# Altium PCB PCB3.PcbDoc
Units mm, origin at the board's own origin, x right, y up, seen from the top; angles counter-clockwise.
Board outline 58.93 x 70.99 mm, 2 copper layers (Top Layer, Bottom Layer); 30 components, 38 nets, 155 pads, 2 vias.
Unrouted connection lines stored in the file: 53.
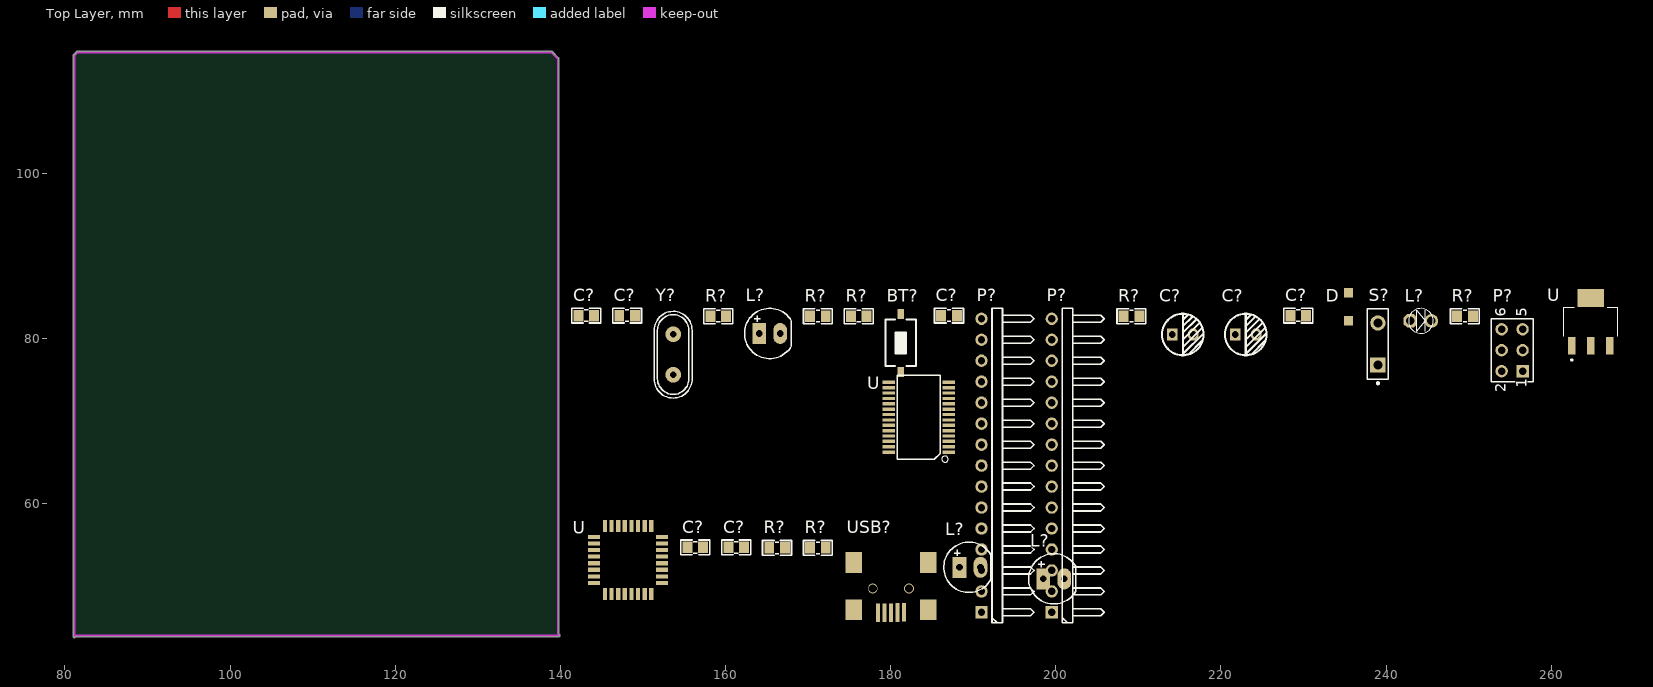
[diagram p0: Top Layer view]
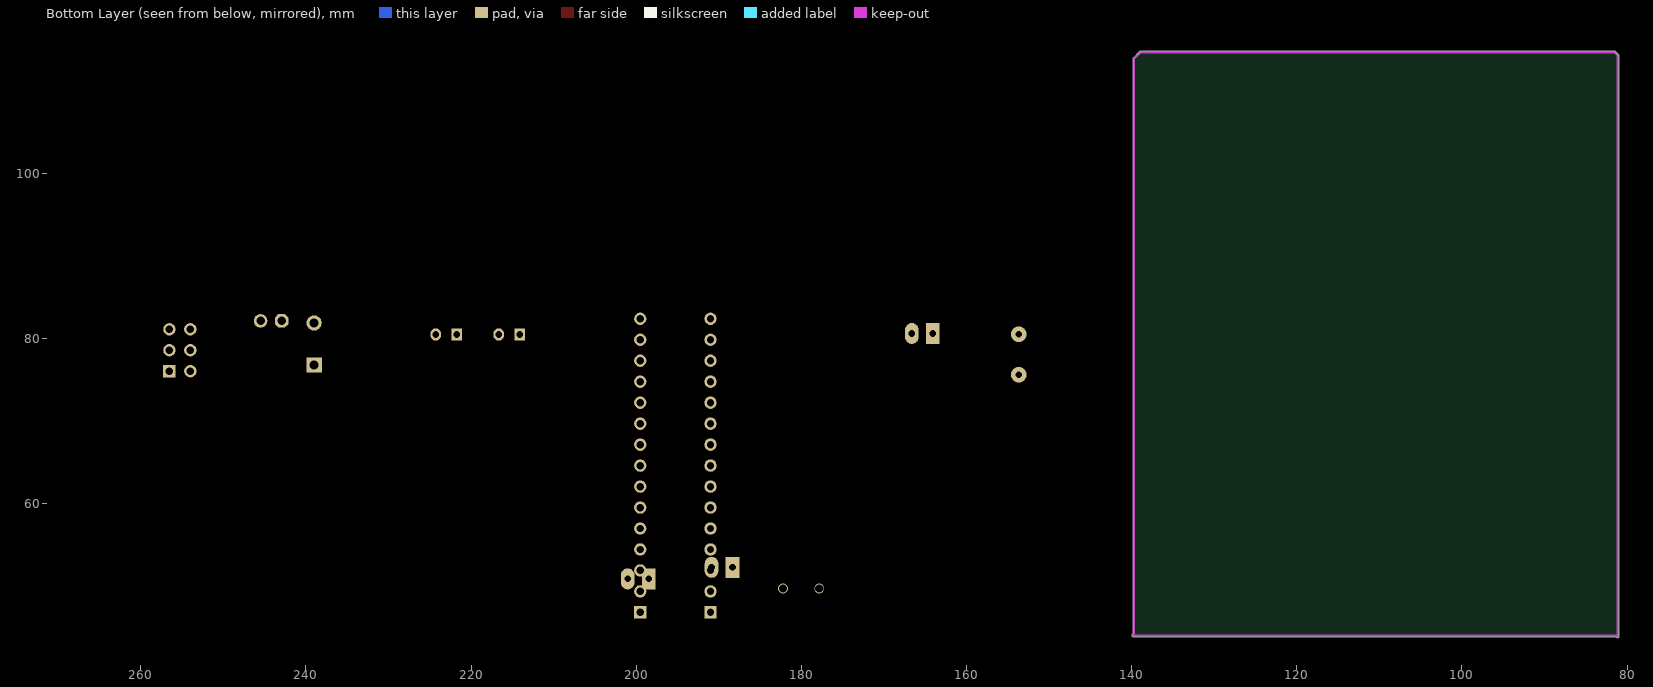
[diagram p1: Bottom Layer view, seen from below]

## Layer stack, top to bottom
Top Solder: solder mask 0.0102, Solder Resist, Dk 3.5
Top Layer: signal copper 0.0356
Dielectric 1: dielectric 0.32, FR-4, Dk 4.8
Bottom Layer: signal copper 0.0356
Bottom Solder: solder mask 0.0102, Solder Resist, Dk 3.5

## Board outline
81.026,43.942 ccw(c81.153,43.942) 81.244,43.852 81.333,43.942 139.827,43.942 ccw(c139.827,44.069) 139.954,44.069 ccw(c139.827,44.069) 139.917,44.16 139.827,44.249 139.827,113.919 ccw(c139.7,113.919) 139.79,114.01 139.028,114.771 ccw(c138.938,114.682) 138.938,114.808 81.534,114.808 ccw(c81.534,114.681) 81.443,114.771 81.063,114.39 ccw(c81.152,114.3) 81.026,114.3

## Design rules (kind name [scope] priority, off if disabled: settings)
Clearance [All] p1: gap=0.254 ignorepadtopadclearanceinfootprint=FALSE except(0: Arc-Hole Track-Hole SMDPad-Hole THPad-Hole Via-Hole Fill-Hole Poly-Hole Region-Hole Text-Hole)
PolygonConnect [All] p1: connectstyle=Relief reliefconductorwidth=0.254 reliefentries=4 polygonreliefangle="90 Angle" airgapwidth=0.254
RoomDefinition Sheet4 [InComponentClass('Sheet4')] p1: confinementstyle=ConfineIn formatcopy=TRUE lockcomponents=FALSE outline 154.686,61.087 184.531,61.087 184.531,72.009 154.686,72.009
RoutingVias [All] p1: holewidth=0.254 width=0.254 viastyle="Through Hole" minholewidth=0.457 minwidth=0.508 maxholewidth=0.711 maxwidth=1.27
SolderMaskExpansion [All] p1: expansion=0.102 istentingtop=FALSE
Width [All] p1: maxlimit=1.27 minlimit=0.254 preferedwidth=0.254
30 further rules are at their usual default settings.

## Classes and differential pairs
component class Sheet4: BT? C? D L? P? R? S? U USB? Y?

## Components (designator, comment, footprint, x,y, rotation, side; value= is the part's Value field where it differs from the comment)
BT? "Nut Nhan 2 Chan SMD 3x6x2.5" "Nut Nhan 2 Chan SMD 3x6x2.5" 181.229,79.502 r90 top
C? "15pF" "tu 0805" 148.082,82.804 r0 top
C? "104" "tu 0805" 187.071,82.804 r0 top
C? "4.7uF" "tu hoa 5mm" 223.012,80.518 r0 top
C? "104" "tu 0805" 229.362,82.804 r0 top
C? "15pF" "tu 0805" 143.129,82.804 r0 top
C? "4.7uF" "tu hoa 5mm" 215.392,80.518 r0 top
C? "104" "tu 0805" 161.29,54.737 r0 top
C? "104" "tu 0805" 156.337,54.737 r0 top
D "MBR0520" SOD-123 235.458,82.169 r90 top
L? "LED 5mm" LED-5MM-RED 164.084,80.645 r0 top
L? "LED 3mm" LED-3MM-GREEN 242.951,82.169 r0 top
L? "LED 5mm" LED-5MM-RED 198.501,50.927 r0 top
L? "LED 5mm" LED-5MM-BLUE 189.484,52.324 r0 top
P? "Header 15H" HDR1X15H 199.517,46.863 r90 top
P? "Header 3X2" HDR2X3 256.54,76.073 r90 top
P? "Header 15H" HDR1X15H 191.008,46.863 r90 top
R? "680R" "Tro SMD 0805" 159.131,82.804 r0 top
R? "1k" "tro smd 0805" 176.149,82.804 r0 top
R? "1k" "tro smd 0805" 209.169,82.804 r0 top
R? "1k" "tro smd 0805" 171.196,82.804 r0 top
R? "680R" "Tro SMD 0805" 249.555,82.804 r0 top
R? "680R" "tro smd 0805" 171.196,54.737 r0 top
R? "680R" "tro smd 0805" 166.243,54.737 r0 top
S? "SW-SPST" SPST-2 239.014,79.375 r90 top
U "UA78M05IDCY" SOT230P700X180-4N 264.795,82.042 r90 top
U "INTERFACE-FT232RL(SSOP28)" SSOP28-0.65-10.2X5.2MM 183.415,70.5 r90 top
U "ATMEGA168-20AU" QFP80P900X900X120-32N 148.209,53.213 r90 top
USB? "USB Mini 5p SMD" "USB Mini 5p SMD" 179.959,50.292 r0 top
Y? "16Mhz" "Thach Anh 2 chan cam" 153.67,78.105 r90 top value=4Mhz

## Footprints (in the part's own frame and the unit in brackets; to place one, negate y for a bottom-side part, rotate by r counter-clockwise, add the part's x,y. Pads: shape width x height; smd on the part's side, far side on the other; paste and mask are expansions set on the pad)
HDR1X15H [mm] "Connector; Header; 15 Position; Right Angle"
  rect 1.5x1.5 hole 0.9: 1(0,0)
  round 1.5 hole 0.9: 2(2.54,0) 3(5.08,0) 4(7.62,0) 5(10.16,0) 6(12.7,0) 7(15.24,0) 8(17.78,0) 9(20.32,0) 10(22.86,0) 11(25.4,0) 12(27.94,0) 13(30.48,0) 14(33.02,0) 15(35.56,0)
  silkscreen extent -1.27,-6.35 36.83,-1.27
HDR2X3 [mm] "Connector; Header; 3x2 Position"
  rect 1.5x1.5 hole 0.9: 1(0,0)
  round 1.5 hole 0.9: 2(0,2.54) 3(2.54,0) 4(2.54,2.54) 5(5.08,0) 6(5.08,2.54)
  silkscreen extent -1.27,-1.27 6.35,3.81
LED-3MM-GREEN [mil]
  oct 65x65 hole 40: 1(0,0)
  round 65 hole 40: 2(100,0)
  silkscreen extent -9,-59 109,59, body extent -15,-70 112,60, height 182
LED-5MM-BLUE [mil] "LED 2 PIN, 5 ly , Only colour, pin to pin 110mil"
  rect 65x100 hole 32: 1(-45,0)
  oval 65x100 hole 32: 2(55,0)
  silkscreen extent -120,-120 104,120, body extent -113,-120 100,117, height 339
LED-5MM-RED [mil] "LED 2 PIN, 5 ly , Only colour,pin to pin 100mil"
  rect 65x100 hole 32: 1(0,0)
  oval 65x100 hole 32: 2(100,0)
  silkscreen extent -70,-120 154,120, body extent -65,-119 149,118, height 339
"Nut Nhan 2 Chan SMD 3x6x2.5" [mm] "Switch SMD type"
  rect 1.2x0.8 smd: 1(-3.5,0) 2(3.5,0)
  silkscreen extent -2.82,-1.85 2.82,1.85, body extent -3.05,-1.85 3.05,1.85, height 2.5
QFP80P900X900X120-32N [mil]
  rect 58x20 smd: 1(-162,110) 2(-162,79) 3(-162,47) 4(-162,16) 5(-162,-16) 6(-162,-47) 7(-162,-79) 8(-162,-110) 17(162,-110) 18(162,-79) 19(162,-47) 20(162,-16) 21(162,16) 22(162,47) 23(162,79) 24(162,110)
  rect 20x58 smd: 9(-110,-162) 10(-79,-162) 11(-47,-162) 12(-16,-162) 13(16,-162) 14(47,-162) 15(79,-162) 16(110,-162) 25(110,162) 26(79,162) 27(47,162) 28(16,162) 29(-16,162) 30(-47,162) 31(-79,162) 32(-110,162)
  body extent -177,-177 177,177, height 46
SOD-123 [mil]
  rect 45x45 smd: 1(0,0) 2(135,0)
  body extent -7,-26 137,35, height 55
SOT230P700X180-4N [mm]
  rect 2.15x0.95 smd: 1(-2.9,2.3) 2(-2.9,0) 3(-2.9,-2.3)
  rect 2.15x3.25 smd: 4(2.9,0)
  silkscreen extent -4.7,-3.25 1.75,3.25, body extent -3.5,-3.25 3.5,3.25, height 1.75
SPST-2 [mm] "Switch; 2 Leads"
  rect 1.85x1.85 hole 1.1: 1(-2.54,0)
  round 1.85 hole 1.1: 2(2.54,0)
  silkscreen extent -4.89,-1.27 4.28,1.27
SSOP28-0.65-10.2X5.2MM [mm]
  rect 0.4x1.5 smd: 1(-4.225,-3.625) 2(-3.575,-3.625) 3(-2.925,-3.625) 4(-2.275,-3.625) 5(-1.625,-3.625) 6(-0.975,-3.625) 7(-0.325,-3.625) 8(0.325,-3.625) 9(0.975,-3.625) 10(1.625,-3.625) 11(2.275,-3.625) 12(2.925,-3.625) 13(3.575,-3.625) 14(4.225,-3.625) 15(4.225,3.625) 16(3.575,3.625) 17(2.925,3.625) 18(2.275,3.625) 19(1.625,3.625) 20(0.975,3.625) 21(0.325,3.625) 22(-0.325,3.625) 23(-0.975,3.625) 24(-1.625,3.625) 25(-2.275,3.625) 26(-2.925,3.625) 27(-3.575,3.625) 28(-4.225,3.625)
  silkscreen extent -5.46,-3.56 5.1,2.6, body extent -5.12,-3.9 5.08,3.9, height 2
"Thach Anh 2 chan cam" [mm]
  round 1.905 hole 0.8: 1(-2.45,0) 2(2.45,0)
  silkscreen extent -5.28,-2.29 5.21,2.29, body extent -5.68,-2.36 5.68,2.29, height 3.5
"Tro SMD 0805" [mm]
  rect 1.2x1.4 smd: 1(-0.946,-0.061) 2(0.954,-0.061)
  silkscreen extent -1.75,-0.97 1.75,0.84, body extent -1.56,-0.76 1.44,0.64, height 0.53
"tro smd 0805" [mm]
  rect 1.2x1.4 smd: 1(-0.946,-0.061) 2(0.954,-0.061)
  silkscreen extent -1.75,-0.97 1.75,0.84, body extent -1.56,-0.76 1.44,0.64, height 0.53
"tu 0805" [mm] "Compoment SMD 80x50mil"
  rect 1.2x1.4 smd: 1(-0.946,-0.003) 2(0.954,-0.003)
  silkscreen extent -1.75,-0.89 1.75,0.89, body extent -1.01,-0.64 1.01,0.63, height 0.61
"tu hoa 5mm" [mm]
  rect 1.3x1.5 hole 0.8: 1(-1.27,0)
  oval 1.3x1.5 hole 0.8: 2(1.27,0)
  silkscreen extent -2.51,-2.51 2.51,2.51, body extent -3.12,-3.18 3.23,3.18, height 14.55
"USB Mini 5p SMD" [mm]
  rect 0.5x2.25 smd: 1(1.651,-3.429) 2(0.864,-3.442) 3(0.076,-3.454) 4(-0.711,-3.467) 5(-1.499,-3.48)
  rect 2x2.5 smd: 5(-4.424,-3.124) 5(-4.42,2.616) 5(4.576,-3.124) 5(4.58,2.616)
  body extent -5.27,-3.8 5.43,5.4, height 3.95

## Part data
C? C?: library part "Tu 0805 15pF 50V 10%", "Dán", Chung_Loai=Dán, Don_Vi=Con, Ma_Hang=MH004556, So_Chan=2, Ten_Linh_Kien="Tụ 0805 15P 10% 50V"
C? C? C? C?: library part "Tu 0805 104 50V 10%", "Dán", Chung_Loai=Dán, Don_Vi=Con, Ma_Hang=MH004551, So_Chan=2, Ten_Linh_Kien="Tụ 0805 104-100nF 10% 50V"
C? C?: library part "Tu Hoa 4.7uF 50V 5x11", "Cắm", Chung_Loai=Cắm, Don_Vi=Con, Ma_Hang=MH001357, So_Chan=2, Ten_Linh_Kien="Tụ Hóa 4.7uF 50V 5x11MM"
D: "Diode Schottky 20V 500mA Surface Mount SOD-123", Package="SOD-123 International Rectifier", Availability=Unavailable, MF="ON Semiconductor", MP=MBR0520, Price=None, SnapEDA_Link=https://www.snapeda.com/parts/MBR0520/ON%20Semiconductor/view-part/564242/?ref=snap
L? L?: library part "LED 5mm Do", "Cắm", Chung_Loai=Cắm, Don_Vi=Con, Ma_Hang=MH008967, Ten_Linh_Kien="Led 5MM Phủ Đỏ (1000c)"
L?: library part "LED 3mm Xanh La", "Cắm", Chung_Loai=Cắm, Don_Vi=Con, Ma_Hang=MH001054, Ten_Linh_Kien="Led 3MM Phủ Xanh (10c)"
L?: library part "LED 5mm Xanh Duong", "Cắm", Chung_Loai=Cắm, Don_Vi=Con, Ma_Hang=MH008987, Ten_Linh_Kien="Led 5MM Xanh Dương Đục (1000c)"
P? P?: "Header, 15-Pin, Right Angle", LatestRevisionDate=17-Jul-2002, LatestRevisionNote="Re-released for DXP Platform.", Publisher="Altium Limited"
P?: "Header, 3-Pin, Dual row", LatestRevisionDate=17-Jul-2002, LatestRevisionNote="Re-released for DXP Platform.", Publisher="Altium Limited"
R? R?: library part "Tro 0805 5% 680R", "Dán", Chung_Loai=Dán, Don_Vi=Con, Ma_Hang=MH005344, So_Chan=2, Ten_Linh_Kien="Trở 0805 5% 680R"
R? R? R?: library part "Tro 0805 1% 1k", "Dán", Chung_Loai=Dán, Don_Vi=Con, Ma_Hang=MH005468, So_Chan=2, Ten_Linh_Kien="Trở 0805 1% 1k"
R? R?: library part "Tro 0805 1% 680R", "Dán", Chung_Loai=Dán, Don_Vi=Con, Ma_Hang=MH005487, So_Chan=2, Ten_Linh_Kien="Trở 0805 1% 680R"
S?: "Single-Pole, Single-Throw Switch", LatestRevisionDate=17-Jul-2002, LatestRevisionNote="Re-released for DXP Platform.", PackageDescription="Switch; 2 Leads", PackageReference=SPST-2, Published=24-Mar-1999, Publisher="Altium Limited"
U: "500-mA, 25-V, Linear Voltage Regulators", Package="SOT-223-4 Texas Instruments", Arrow_Electronics-Purchase-URL=https://snapeda.com/shop?store=Arrow+Electronics&id=1101226, Availability=Unavailable, DigiKey-Purchase-URL=https://snapeda.com/shop?store=DigiKey&id=1101226, MF="Texas Instruments", Mouser-Purchase-URL=https://snapeda.com/shop?store=Mouser&id=1101226, MP=UA78M05IDCY, Price=None, SnapEDA_Link=https://www.snapeda.com/parts/UA78M05IDCY/Texas%20Instruments/view-part/1101226/?ref=snap, Texas_Instruments-Purchase-URL=https://snapeda.com/shop?store=Texas+Instruments&id=1101226
U: "USB Bridge, USB to UART USB 2.0 UART Interface 28-SSOP", Package="SSOP-28 FTDI, Future", Availability=Unavailable, MF="FTDI, Future", MP=FT232RL, Price=None, SnapEDA_Link=https://www.snapeda.com/parts/FT232RL/FTDI%2C%20Future%20Technology%20Devices%20International%20Ltd/view-part/1077088/?ref=snap
U: "AVR AVRÂ® ATmega Microcontroller IC 8-Bit 20MHz 16KB _8K x 16_ FLASH 32-TQFP _7x7_", Package="TQFP-32 Microchip", Availability=Unavailable, MF=Microchip, MP=ATMEGA168-20AU, Price=None, SnapEDA_Link=https://www.snapeda.com/parts/ATMEGA168-20AU/Microchip/view-part/776709/?ref=snap
USB?: "USB Type B", Ma_Hang=MH001022, Ten="MiniUSB 5P SMD"
Y?: library part "Thach Anh 2 chan Cam", "Crystal For all Crystal 2pin."
BT?: Ma_Hang=MH001036, Ten="Nút Nhấn 2 Chân 3x6x2.5MM SMD"

## Via types
v1: diameter 1.2, hole 1, Top Layer to Bottom Layer, 2 vias

## Nets (pads, with @x,y where several pads share a name; then routed paths per layer and width w, separated by ;. In a path a pad name is that pad's centre, name@x,y a point inside that pad or via, vN(x,y) a via of type N, cw(c..) or ccw(c..) an arc to the next point about the centre after c; other vN are vias at no path point)
+3.3: C?.2@157.291,54.734 P?.2@191.008,49.403 U.17@179.79,73.425
A0: P?.11@191.008,72.263
A1: P?.10@191.008,69.723
A2: P?.9@191.008,67.183
A3: P?.8@191.008,64.643
A4: P?.7@191.008,62.103
A5: P?.6@191.008,59.563
A6: P?.5@191.008,57.023
A7: P?.4@191.008,54.483
AREF: P?.3@191.008,51.943 S?.1
D0/RX: P?.2@199.517,49.403
D1/TX: P?.1@199.517,46.863
D2: P?.5@199.517,57.023
D3: P?.6@199.517,59.563
D4: P?.7@199.517,62.103
D5: P?.8@199.517,64.643
D6: P?.9@199.517,67.183
D7: P?.10@199.517,69.723
D8: P?.11@199.517,72.263
D9: P?.12@199.517,74.803
D10: P?.13@199.517,77.343
D11/MOSI: P?.14@199.517,79.883
D12/MISO: P?.1@256.54,76.073 P?.15@199.517,82.423
D13/SCK: P?.1@191.008,46.863 P?.3@256.54,78.613
DX: R?.2@172.15,82.743
GND: BT?.2 C?.1@142.183,82.801 C?.1@147.136,82.801 C?.1@155.391,54.734 C?.1@228.416,82.801 C?.2@188.025,82.801 C?.2@216.662,80.518 C?.2@224.282,80.518 L?.2@166.624,80.645 L?.2@245.491,82.169 P?.4@199.517,54.483 P?.6@254,81.153 P?.14@191.008,79.883 U.2@264.795,79.142 U.4@264.795,84.942 U.7@187.04,70.175 U.18@179.79,72.775 U.21@179.79,70.825 U.25@179.79,68.225 USB?.5
NetC?_2: C?.2@162.244,54.734 U.2@187.04,66.925
NetL?_1: L?.1@242.951,82.169 R?.2@250.509,82.743
NetL?_2: L?.2@201.041,50.927 R?.1@165.297,54.676
NetLabel41: P?.4@254,78.613
NetR?_2: R?.2@172.15,54.676 U.22@179.79,70.175
NetU_15: U.15@179.79,74.725 USB?.3
NetU_16: U.16@179.79,74.075 USB?.2
RESET: BT?.1 C?.1@160.344,54.734 C?.1@214.122,80.518 C?.1@221.742,80.518 C?.2@230.316,82.801 D.1 L?.1@188.341,52.324 L?.1@198.501,50.927 P?.2@254,76.073 P?.3@199.517,51.943 P?.5@256.54,81.153 P?.13@191.008,77.343 R?.1@208.223,82.743 R?.1@248.609,82.743 R?.2@210.123,82.743 S?.2 U.3@267.095,79.142 U.4@187.04,68.225 U.20@179.79,71.475
RX: U.5@187.04,68.875
TX: U.1@187.04,66.275
VIN: P?.15@191.008,82.423 U.1@262.495,79.142
VUSB: D.2 USB?.1
pads on no net: C?.1@186.125,82.801 C?.2@144.083,82.801 C?.2@149.036,82.801 L?.1@164.084,80.645 L?.2@190.881,52.324 P?.12@191.008,74.803 R?.1@158.185,82.743 R?.1@170.25,54.676 R?.1@170.25,82.743 R?.1@175.203,82.743 R?.2@160.085,82.743 R?.2@167.197,54.676 R?.2@177.103,82.743 U.1@145.415,49.098 U.2@146.202,49.098 U.3@147.015,49.098 U.3@187.04,67.575 U.4@147.803,49.098 U.5@148.615,49.098 U.6 U.7@150.216,49.098 U.8 U.9 U.10 U.11 U.12 U.13 U.14 U.15@152.324,55.22 U.16@152.324,56.007 U.17@151.003,57.328 U.18@150.216,57.328 U.19 U.20@148.615,57.328 U.21@147.803,57.328 U.22@147.015,57.328 U.23 U.24 U.25@144.094,56.007 U.26 U.27 U.28 U.29 U.30 U.31 U.32 USB?.4 Y?.1 Y?.2
copper on no net:
  other v1: 177.835,49.748 182.235,49.748

## Keep-outs
Keep-Out Layer:
  lines w0.254: 81.153,110.998 81.153,114.3 81.534,114.681 138.938,114.681 139.7,113.919 139.7,44.196 139.827,44.069 81.28,44.069 81.153,43.942 81.153,111.252

## Text inside footprints (layer, text, board x,y; h text height)
P?: Top Overlay "6" at 254.508,82.677 h1.27 r90; Top Overlay "5" at 257.048,82.677 h1.27 r90; Top Overlay "2" at 254.508,73.533 h1.27 r90; Top Overlay "1" at 257.048,74.041 h1.27 r90